# Altium PCB MDQARM.PcbDoc
Units mm, origin at the board's own origin, x right, y up, seen from the top; angles counter-clockwise.
Board outline 100 x 100 mm, 2 copper layers (Top Layer, Bottom Layer), stack 1.536 mm thick; 171 components, 109 nets, 550 pads, 0 vias.
Unrouted connection lines stored in the file: 380.
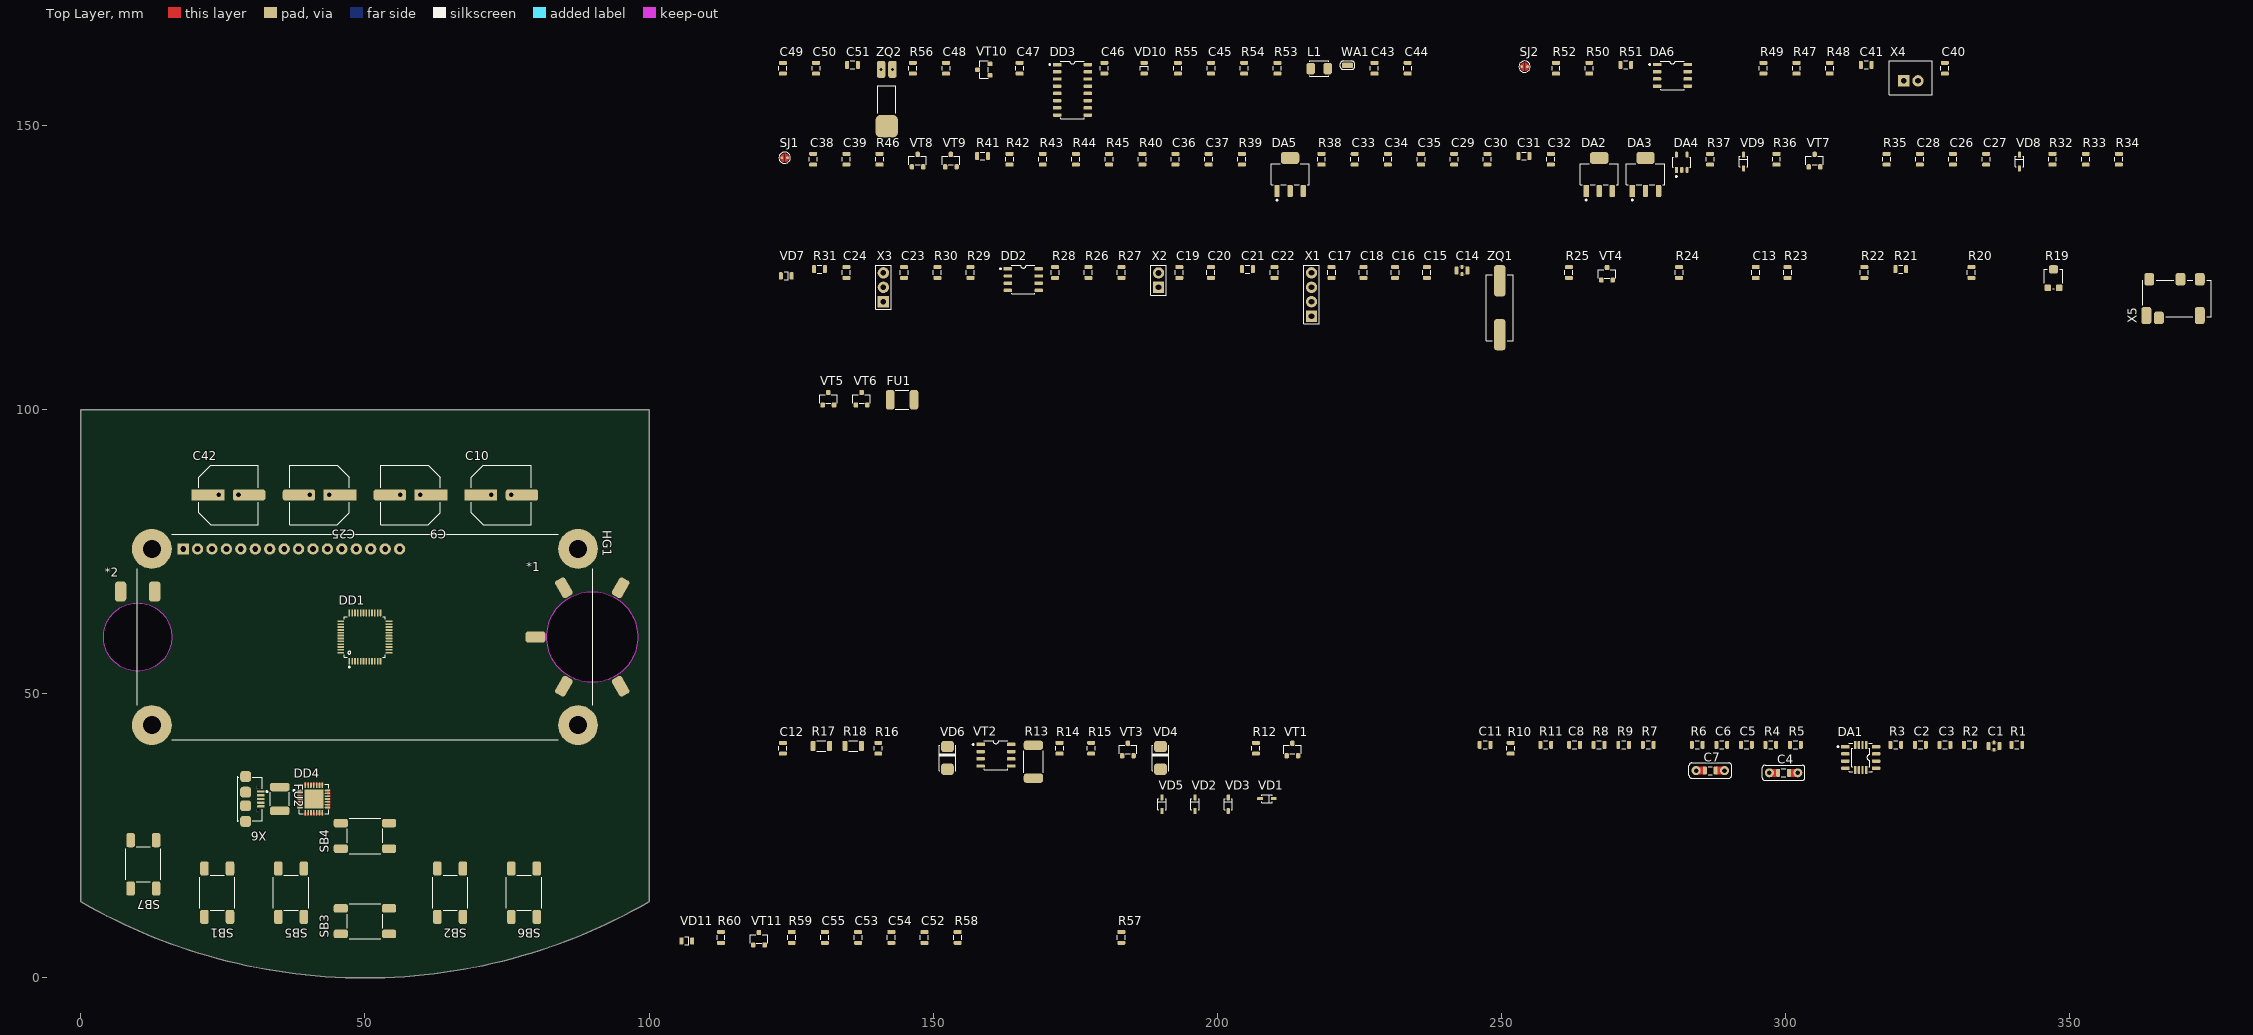
[diagram p0: Top Layer view]
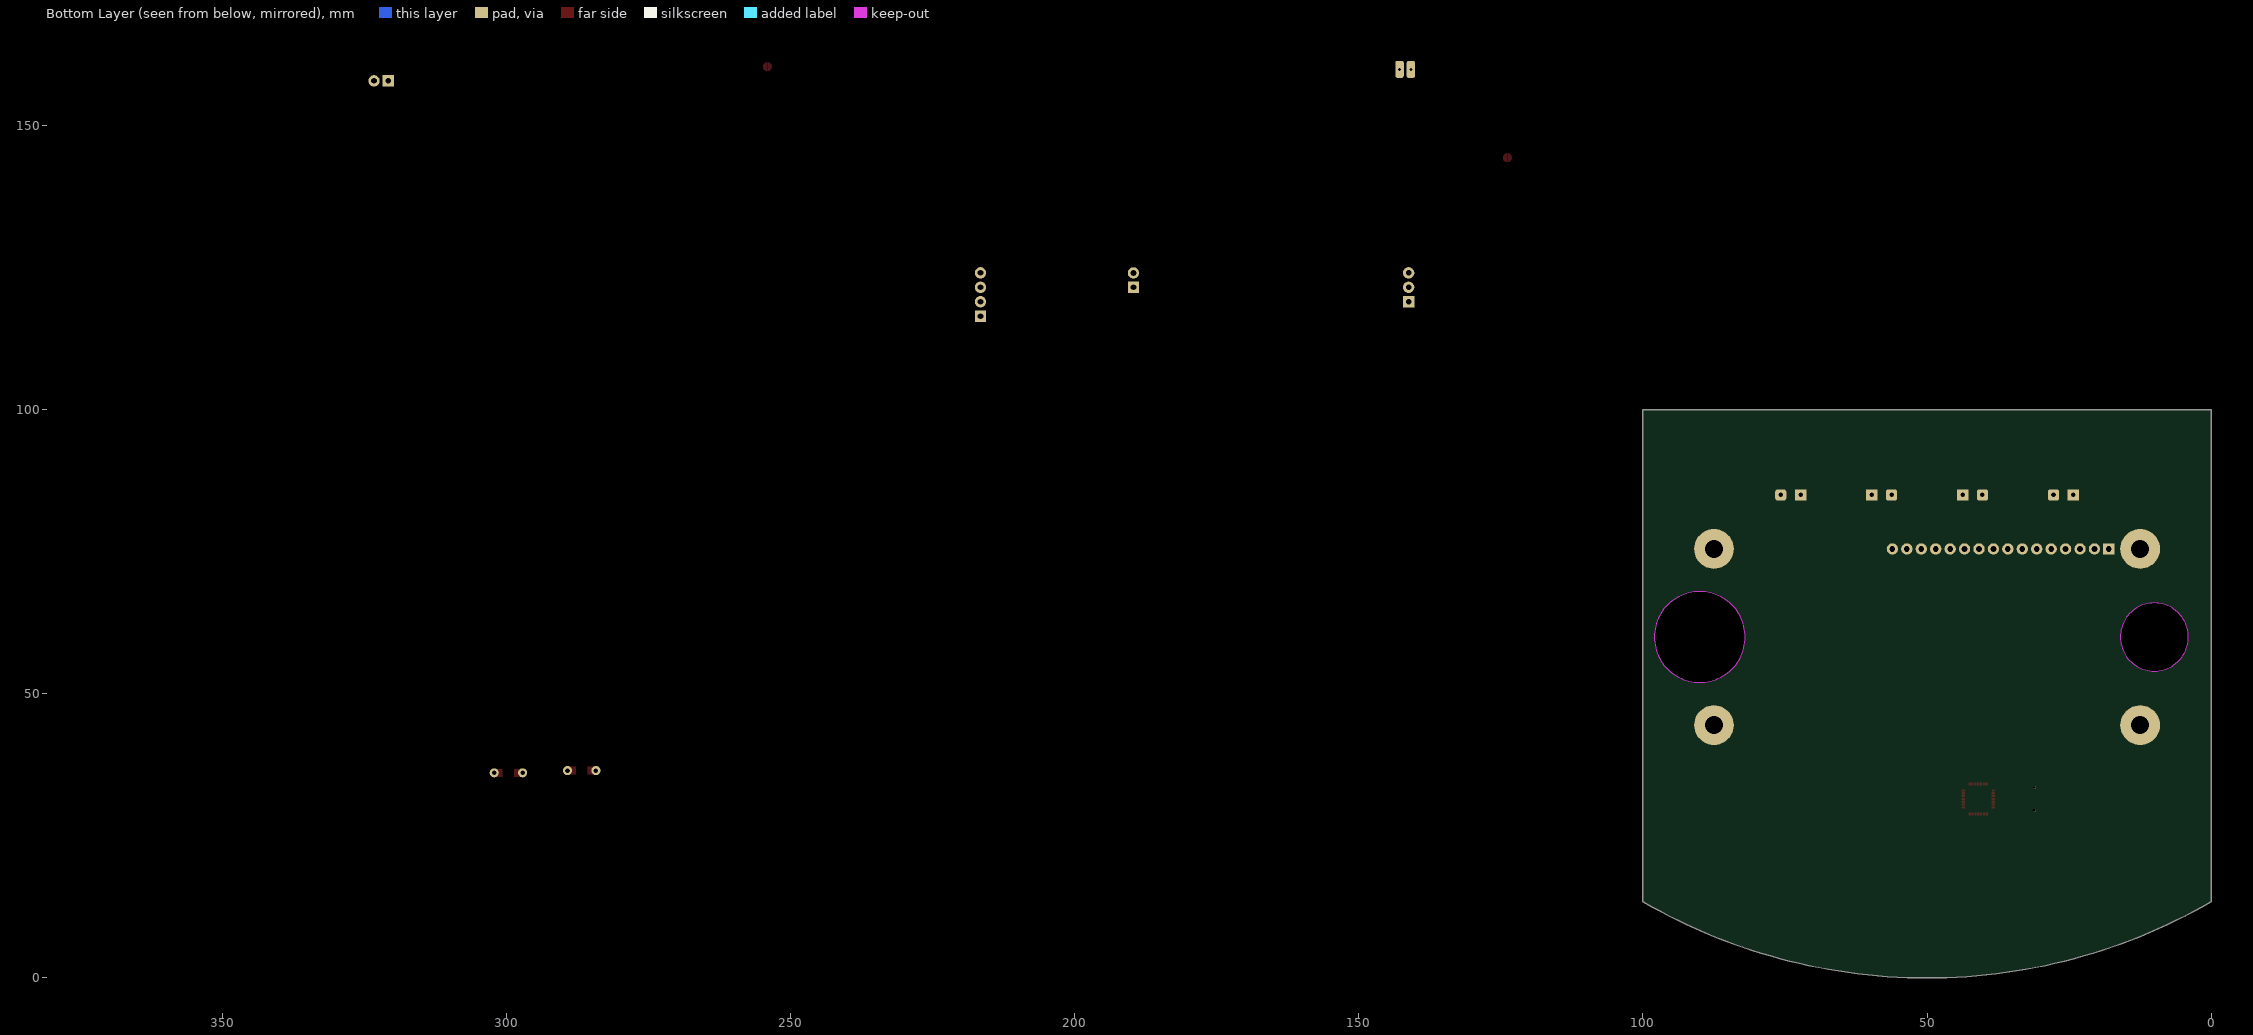
[diagram p1: Bottom Layer view, seen from below]

## Layer stack, top to bottom
Top Solder: solder mask 0.01, Solder Resist, Dk 3.5
Top Layer: signal copper 0.018
Dielectric 1: dielectric 1.5, FR-4, Dk 4.8
Bottom Layer: signal copper 0.018
Bottom Solder: solder mask 0.01, Solder Resist, Dk 3.5

## Board outline
0,13.397 ccw(c50,100) 100,13.397 100,13.398 100,100 0,100

## Design rules (kind name [scope] priority, off if disabled: settings)
Clearance [All] p1: gap=0.2 ignorepadtopadclearanceinfootprint=FALSE
PolygonConnect [All] p1: connectstyle=Relief reliefconductorwidth=0.254 reliefentries=4 polygonreliefangle="90 Angle" airgapwidth=0.254
RoutingVias [All] p1: holewidth=0.711 width=1.27 viastyle="Through Hole" minholewidth=0.711 minwidth=1.27 maxholewidth=0.711 maxwidth=1.27
SolderMaskExpansion [All] p1: expansion=0.102
Width [All] p1: maxlimit=0.254 minlimit=0.254 preferedwidth=0.254
30 further rules are at their usual default settings.

## Classes and differential pairs
component class MDQARM_POWER: *2 C25 C26 C27 C28 C29 C30 C31 C32 C33 C34 C35 C36 C37 C38 C39 DA2 DA3 DA4 DA5 FU1 R32 R33 R34 R35 R36 R37 R38 R39 R40 R41 R42 R43 R44 R45 R46 SB7 SJ1 VD8 VD9 VT5 VT6 VT7 VT8 VT9
component class MDQARM_USB_UART: C52 C53 C54 C55 DD4 FU2 R57 R58 R59 R60 VD11 VT11 X6
component class MDQARM_SOUND: C40 C41 C42 C43 C44 C45 C46 C47 C48 C49 C50 C51 DA6 DD3 L1 R47 R48 R49 R50 R51 R52 R53 R54 R55 R56 SJ2 VD10 VT10 WA1 X4 X5 ZQ2
component class MDQARM_COIL: *1 C1 C2 C3 C4 C5 C6 C7 C8 C9 C10 C11 C12 DA1 R1 R2 R3 R4 R5 R6 R7 R8 R9 R10 R11 R12 R13 R14 R15 R16 R17 R18 VD1 VD2 VD3 VD4 VD5 VD6 VT1 VT2 VT3
component class MDQARM_MCU: C13 C14 C15 C16 C17 C18 C19 C20 C21 C22 C23 C24 C? DD1 DD2 DD? HG1 R19 R20 R21 R22 R23 R24 R25 R26 R27 R28 R29 R30 R31 R? SB1 SB2 SB3 SB4 SB5 SB6 SB? VD7 VT4 X1 X2 X3 X? ZQ1

## Components (designator, comment, footprint, x,y, rotation, side; value= is the part's Value field where it differs from the comment)
*1 "Connector MD_COIL" "Connector MD_COIL" 90,60 r0 top
*2 "Connector MD_POWER" "Connector MD_POWER" 10,60 r0 top
C1 "1,0" "Filter NFM21PC" 336.702,40.801 r0 top
C2 "10,0" "Capacitor SMD0805-T1.35" 323.752,41.026 r0 top
C3 "0,01" "Capacitor SMD0805-T0.75" 328.077,41.026 r0 top
C4 "0,1" "Capacitor SMD0805_5mm" 299.675,36.1 r0 top
C5 "4700" "Capacitor SMD0805-T0.75" 293.125,41.026 r0 top
C6 "22" "Capacitor SMD0805-T0.75" 288.8,41.026 r0 top
C7 "0,033" "Capacitor SMD0805_5mm" 286.775,36.5 r0 top
C8 "4700" "Capacitor SMD0805-T0.75" 262.899,41.026 r0 top
C9 "1000,0" "Capacitor ECAP SMD10x10.5" 58,85 r180 top
C10 "1000,0" "Capacitor ECAP SMD10x10.5" 74,85 r0 top
C11 "0,1" "Capacitor SMD0805-T0.95" 247.148,41.026 r0 top
C12 "2,2" "Capacitor SMD0805-T1.35" 123.567,40.426 r90 top
C13 "0,01" "Capacitor SMD0805-T0.75" 294.775,124.155 r90 top
C14 "1,0" "Filter NFM21PC" 243.073,124.505 r0 top
C15 "0,1" "Capacitor SMD0805-T0.95" 236.898,124.155 r90 top
C16 "0,01" "Capacitor SMD0805-T0.75" 231.297,124.155 r90 top
C17 "30" "Capacitor SMD0805-T0.75" 220.122,124.155 r90 top
C18 "30" "Capacitor SMD0805-T0.75" 225.722,124.155 r90 top
C19 "0,1" "Capacitor SMD0805-T0.95" 193.32,124.155 r90 top
C20 "0,1" "Capacitor SMD0805-T0.95" 198.896,124.155 r90 top
C21 "0,1" "Capacitor SMD0805-T0.95" 205.321,124.755 r0 top
C22 "10,0" "Capacitor SMD0805-T1.35" 210.071,124.155 r90 top
C23 "0,1" "Capacitor SMD0805-T0.95" 144.893,124.155 r90 top
C24 "0,1" "Capacitor SMD0805-T0.95" 134.743,124.155 r90 top
C25 "470,0" "Capacitor ECAP SMD10x10.5" 42,85 r180 top
C26 "0,1" "Capacitor SMD0805-T0.95" 329.477,144.081 r90 top
C27 "4,7" "Capacitor SMD0805-T1.35" 335.327,144.081 r90 top
C28 "1,0" "Capacitor SMD0805-T1.35" 323.652,144.081 r90 top
C29 "0,1" "Capacitor SMD0805-T0.95" 241.698,144.081 r90 top
C30 "10,0" "Capacitor SMD0805-T1.35" 247.548,144.081 r90 top
C31 "10,0" "Capacitor SMD0805-T1.35" 253.973,144.656 r0 top
C32 "10,0" "Capacitor SMD0805-T1.35" 258.724,144.081 r90 top
C33 "10,0" "Capacitor SMD0805-T1.35" 224.197,144.081 r90 top
C34 "0,01" "Capacitor SMD0805-T0.75" 230.022,144.081 r90 top
C35 "10,0" "Capacitor SMD0805-T1.35" 235.872,144.081 r90 top
C36 "0,1" "Capacitor SMD0805-T0.95" 192.645,144.081 r90 top
C37 "0,1" "Capacitor SMD0805-T0.95" 198.496,144.081 r90 top
C38 "0,68" "Capacitor SMD0805-T0.95" 128.892,144.081 r90 top
C39 "0,68" "Capacitor SMD0805-T0.95" 134.743,144.081 r90 top
C40 "4700" "Capacitor SMD0805-T0.75" 328.052,160.106 r90 top
C41 "1,0" "Capacitor SMD0805-T1.35" 314.226,160.681 r0 top
C42 "470,0" "Capacitor ECAP SMD10x10.5" 26,85 r0 top
C43 "0,1" "Capacitor SMD0805-T0.95" 227.672,160.106 r90 top
C44 "1,0" "Capacitor SMD0805-T1.35" 233.522,160.106 r90 top
C45 "1000" "Capacitor SMD0805-T0.75" 198.921,160.106 r90 top
C46 "0,1" "Capacitor SMD0805-T0.95" 180.12,160.106 r90 top
C47 "10" "Capacitor SMD0805-T0.75" 165.219,160.106 r90 top
C48 "0,1" "Capacitor SMD0805-T0.95" 152.268,160.106 r90 top
C49 "0,1" "Capacitor SMD0805-T0.95" 123.567,160.106 r90 top
C50 "15" "Capacitor SMD0805-T0.75" 129.392,160.106 r90 top
C51 "15" "Capacitor SMD0805-T0.75" 135.818,160.681 r0 top
C52 "1,0" "Capacitor SMD0805-T1.35" 148.469,7.132 r90 top
C53 "0,1" "Capacitor SMD0805-T0.95" 136.793,7.132 r90 top
C54 "4,7" "Capacitor SMD0805-T1.35" 142.644,7.132 r90 top
C55 "0,047" "Capacitor SMD0805-T0.75" 130.943,7.132 r90 top
DA1 "AD8606ARZ" "IC AD8606ARZ" 313.251,38.801 r0 top
DA2 "LD1117S33" "IC LD1117S33" 267.224,141.406 r0 top
DA3 "LD1117S50" "IC LD1117S50" 275.374,141.406 r0 top
DA4 "LP2985-33DBVR" "IC LP2985-33DBVR" 281.75,143.556 r0 top
DA5 "LD1117STR" "IC LD1117STR" 212.821,141.406 r0 top
DA6 "MC34119L" "IC MC34119L" 280.1,158.856 r0 top
DD1 "STM32F100C8T6B" "IC STM32F100C8T6B" 50,60 r0 top
DD2 "AT24C08C" "IC AT24C08C" 165.869,122.905 r0 top
DD3 "KT0803L" "IC KT0803L" 174.519,156.306 r0 top
DD4 "CP2102-GMR" "IC CP2102-GMR" 41,31.5 r0 top
FU1 "0,5А" "Fuse MF-NSMF" 144.531,101.756 r0 top
FU2 "0,14А" "Fuse MF-NSMF" 35,31.5 r270 top
HG1 "WH1602" "Indicator WH1602" 50,60 r0 top
L1 "1мкГн" "Inductor SMD1210" 217.947,160.031 r0 top
R1 "10к" "Resistor SMD0805" 340.728,41.026 r0 top
R2 "10к" "Resistor SMD0805" 332.377,41.026 r0 top
R3 "2к" "Resistor SMD0805" 319.427,41.026 r0 top
R4 "100" "Resistor SMD0805" 297.425,41.026 r0 top
R5 "2к" "Resistor SMD0805" 301.751,41.026 r0 top
R6 "100к" "Resistor SMD0805" 284.475,41.026 r0 top
R7 "1,2к" "Resistor SMD0805" 275.849,41.026 r0 top
R8 "100к" "Resistor SMD0805" 267.199,41.026 r0 top
R9 "2к" "Resistor SMD0805" 271.524,41.026 r0 top
R10 "100к" "Resistor SMD0805" 251.648,40.426 r90 top
R11 "10к" "Resistor SMD0805" 257.824,41.026 r0 top
R12 "1к" "Resistor SMD0805" 206.796,40.426 r90 top
R13 "7,5" "Resistor SMD2512" 167.644,38.051 r90 top
R14 "1к" "Resistor SMD0805" 172.244,40.426 r90 top
R15 "1к" "Resistor SMD0805" 177.82,40.426 r90 top
R16 "10к" "Resistor SMD0805" 140.343,40.426 r90 top
R17 "1" "Resistor SMD1206" 130.317,40.826 r0 top
R18 "1" "Resistor SMD1206" 135.918,40.826 r0 top
R19 "10к" "Resistor 3303X-3" 347.178,123.055 r0 top
R20 "10к" "Resistor SMD0805" 332.727,124.155 r90 top
R21 "1к" "Resistor SMD0805" 320.302,124.755 r0 top
R22 "100" "Resistor SMD0805" 313.876,124.155 r90 top
R23 "100" "Resistor SMD0805" 300.376,124.155 r90 top
R24 "100" "Resistor SMD0805" 281.275,124.155 r90 top
R25 "1к" "Resistor SMD0805" 261.899,124.155 r90 top
R26 "4,7к" "Resistor SMD0805" 177.32,124.155 r90 top
R27 "4,7к" "Resistor SMD0805" 183.145,124.155 r90 top
R28 "1к" "Resistor SMD0805" 171.469,124.155 r90 top
R29 "10к" "Resistor SMD0805" 156.569,124.155 r90 top
R30 "10к" "Resistor SMD0805" 150.743,124.155 r90 top
R31 "1к" "Resistor SMD0805" 129.992,124.755 r0 top
R32 "10к" "Resistor SMD0805" 347.003,144.081 r90 top
R33 "100к" "Resistor SMD0805" 352.853,144.081 r90 top
R34 "100к" "Resistor SMD0805" 358.678,144.081 r90 top
R35 "330k" "Resistor SMD0805" 317.801,144.081 r90 top value=330к
R36 "10к" "Resistor SMD0805" 298.426,144.081 r90 top
R37 "220к" "Resistor SMD0805" 286.75,144.081 r90 top
R38 "18к" "Resistor SMD0805" 218.347,144.081 r90 top
R39 "3,3к" "Resistor SMD0805" 204.346,144.081 r90 top
R40 "150" "Resistor SMD0805" 186.82,144.081 r90 top
R41 "1к" "Resistor SMD0805" 158.694,144.656 r0 top
R42 "10к" "Resistor SMD0805" 163.444,144.081 r90 top
R43 "10к" "Resistor SMD0805" 169.294,144.081 r90 top
R44 "220к" "Resistor SMD0805" 175.12,144.081 r90 top
R45 "470k" "Resistor SMD0805" 180.97,144.081 r90 top value=470к
R46 "1к" "Resistor SMD0805" 140.568,144.081 r90 top
R47 "10к" "Resistor SMD0805" 301.951,160.106 r90 top
R48 "33к" "Resistor SMD0805" 307.801,160.106 r90 top
R49 "270" "Resistor SMD0805" 296.125,160.106 r90 top
R50 "1к" "Resistor SMD0805" 265.474,160.106 r90 top
R51 "2" "Resistor SMD0805" 271.899,160.681 r0 top
R52 "2" "Resistor SMD0805" 259.624,160.106 r90 top
R53 "4,7к" "Resistor SMD0805" 210.596,160.106 r90 top
R54 "10к" "Resistor SMD0805" 204.746,160.106 r90 top
R55 "47к" "Resistor SMD0805" 193.07,160.106 r90 top
R56 "1к" "Resistor SMD0805" 146.418,160.106 r90 top
R57 "1к" "Resistor SMD0805" 183.121,7.132 r90 top
R58 "1к" "Resistor SMD0805" 154.319,7.132 r90 top
R59 "1к" "Resistor SMD0805" 125.118,7.132 r90 top
R60 "100к" "Resistor SMD0805" 112.667,7.132 r90 top
SB1 "KLS7-TS6604-4.3-180" "Button KLS7-TS6604-4.3-180" 24,15 r270 top
SB2 "KLS7-TS6604-4.3-180" "Button KLS7-TS6604-4.3-180" 65,15 r270 top
SB3 "KLS7-TS6604-4.3-180" "Button KLS7-TS6604-4.3-180" 50,10 r180 top
SB4 "KLS7-TS6604-4.3-180" "Button KLS7-TS6604-4.3-180" 50,25 r180 top
SB5 "KLS7-TS6604-4.3-180" "Button KLS7-TS6604-4.3-180" 37,15 r270 top
SB6 "KLS7-TS6604-4.3-180" "Button KLS7-TS6604-4.3-180" 78,15 r270 top
SB7 "KLS7-TS6604-4.3-180" "Button KLS7-TS6604-4.3-180" 11,20 r270 top
SJ1 "SolderJump 1" "SolderJump 1" 123.867,144.356 r0 top
SJ2 "SolderJump 1" "SolderJump 1" 254.098,160.381 r0 top
VD1 "1N4148WS" "Diode SOD-323" 208.743,31.55 r0 top
VD2 "1N4148WS" "Diode SOD-323" 196.092,30.575 r90 top
VD3 "1N4148WS" "Diode SOD-323" 201.943,30.575 r90 top
VD4 "ES1J" "Diode SMA" 190.02,38.726 r90 top
VD5 "1N4148WS" "Diode SOD-323" 190.267,30.575 r90 top
VD6 "ES1J" "Diode SMA" 152.518,38.726 r90 top
VD7 "RED" "Diode SMD0805" 124.142,123.555 r0 top
VD8 "1N4148WS" "Diode SOD-323" 341.178,143.681 r90 top
VD9 "BAT54WS" "Diode SOD-323" 292.625,143.681 r90 top
VD10 "RED" "Diode SMD0805" 187.145,160.106 r90 top
VD11 "GREEN" "Diode SMD0805" 106.642,6.507 r0 top
VT1 "BC847B" "Transistor SOT23" 213.221,40.201 r0 top
VT2 "IRF7105PBF" "Transisror IRF7105" 161.044,39.201 r0 top value=IRF7105BPF
VT3 "BC847B" "Transistor SOT23" 184.27,40.201 r0 top
VT4 "BC847B" "Transistor SOT23" 268.599,123.93 r0 top
VT5 "IRLML6402TRPBF" "Transistor SOT23" 131.555,101.931 r0 top
VT6 "IRLML6402TRPBF" "Transistor SOT23" 137.405,101.931 r0 top
VT7 "IRLML2502TRPBF" "Transistor SOT23" 305.126,143.856 r0 top
VT8 "BC847B" "Transistor SOT23" 147.268,143.856 r0 top
VT9 "2N7002" "Transistor SOT23" 153.118,143.856 r0 top
VT10 "2SC3356" "Transistor SOT23" 158.919,159.856 r90 top
VT11 "IRLML2502TRPBF" "Transistor SOT23" 119.343,6.882 r0 top
WA1 "Antenna 1" "Antenna 1" 222.922,160.631 r0 top
X1 "PLS-4" "Connector PLS-4" 216.597,120.28 r90 top
X2 "PLS-2" "Connector PLS-2" 189.67,122.805 r90 top
X3 "PLS-3" "Connector PLS-3" 141.243,121.555 r90 top
X4 "B2B-XH-A" "Connector B2B-XH-A" 322.077,157.881 r0 top
X5 "PJ-311D" "Connector PJ-311D" 372.525,119.575 r180 top
X6 "KLS1-233-0-0-1-T" "Connector KLS1-233-0-0-1-T" 29,31.5 r270 top
ZQ1 "8 МГц" "Quartz HC-49SM" 249.723,117.954 r90 top value=HC-49SM-8MHz
ZQ2 "32768 Гц" "Quartz DT-38T-32768Hz" 141.843,152.906 r90 top value=DT-38T-32768Hz

## Footprints (in the part's own frame and the unit in brackets; to place one, negate y for a bottom-side part, rotate by r counter-clockwise, add the part's x,y. Pads: shape width x height; smd on the part's side, far side on the other; paste and mask are expansions set on the pad)
"Antenna 1" [mm]
  rrect50% 2x1 smd mask+0.075: 1(0,0)
  silkscreen extent -1.25,-0.75 1.25,0.75
"Button KLS7-TS6604-4.3-180" [mm]
  rrect50% 2.5x1.5 smd mask+0.075: 1(-4.25,-2.25) 2(4.25,-2.25) 3(4.25,2.25) 4(-4.25,2.25)
  silkscreen extent -3.1,-3.1 3.1,3.1, body extent -4.5,-3 4.5,3, height 4.3
"Capacitor ECAP SMD10x10.5" [mm]
  rect 5x2 smd mask+0.075: 1(-4,0)
  rect 2x2 hole 0.8 mask+0.075: 1(-1.75,0)
  rrect50% 2x2 hole 0.8 mask+0.075: 2(1.75,0)
  rrect50% 5x2 smd mask+0.075: 2(4,0)
  silkscreen extent -5.25,-5.25 5.25,5.25, body extent -6,-5.25 6,5.25, height 10.5
"Capacitor SMD0805-T0.75" [mm]
  rrect50% 0.7x1.4 smd mask+0.075: 1(-0.95,0) 2(0.95,0)
  silkscreen extent -0.38,-0.7 0.38,0.7, body extent -1.05,-0.67 1.05,0.68, height 0.75
"Capacitor SMD0805-T0.95" [mm]
  rrect50% 0.7x1.4 smd mask+0.075: 1(-0.95,0) 2(0.95,0)
  silkscreen extent -0.38,-0.7 0.38,0.7, body extent -1.05,-0.67 1.05,0.68, height 0.95
"Capacitor SMD0805-T1.35" [mm]
  rrect50% 0.7x1.4 smd mask+0.075: 1(-0.95,0) 2(0.95,0)
  silkscreen extent -0.38,-0.7 0.38,0.7, body extent -1.05,-0.67 1.05,0.68, height 1.35
"Capacitor SMD0805_5mm" [mm]
  round 1.6 hole 0.8 mask+0.075: 1(-2.5,0) 2(2.5,0)
  rrect50% 0.7x1.4 smd mask+0.075: 1(-0.95,0) 2(0.95,0)
  Top Layer region: 2.5,0.7 1,0.7 1,-0.7 2.5,-0.7
  Top Layer region: -2.5,-0.7 -1,-0.7 -1,0.7 -2.5,0.7
  silkscreen extent -3.75,-1.35 3.75,1.35, body extent -3.6,-1.25 3.6,1.25, height 6.5
"Connector B2B-XH-A" [mm]
  rect 2x2 hole 1 mask+0.075: 1(-1.25,0)
  round 2 hole 1 mask+0.075: 2(1.25,0)
  silkscreen extent -3.8,-2.45 3.8,3.5, body extent -3.59,-2.49 3.59,3.35, height 7.21
"Connector KLS1-233-0-0-1-T" [mm]
  rect 0.4x1.35 smd mask+0.075: 1(-1.3,2.675)
  rrect50% 0.4x1.35 smd mask+0.075: 2(-0.65,2.675) 3(0,2.675) 4(0.65,2.675) 5(1.3,2.675)
  rrect50% 1.9x1.9 smd mask+0.075: EP(-3.95,0) EP(-1.2,0) EP(1.2,0) EP(3.95,0)
  round 0.5 hole 0.5 unplated mask+0.075: MH(-2,2.15) MH(2,2.15)
  silkscreen extent -4,-1.35 4,3.88, body extent -3.99,-2.58 3.99,2.85, height 2.73
"Connector MD_COIL" [mm]
  rrect50% 3.5x2 smd rot 120 mask+0.075: 1(5,-8.66) 4(-5,8.66)
  rrect50% 3.5x2 smd rot 60 mask+0.075: 2(-5,-8.66) 5(5,8.66)
  rrect50% 3.5x2 smd mask+0.075: 3(-10,0)
  Keep-Out Layer board cut-out: 0,8 3.061,7.391 5.657,5.657 7.391,3.061 8,0 8,0 7.391,-3.061 5.657,-5.657 3.061,-7.391 0,-8 0,-8 -3.061,-7.391 -5.657,-5.657 -7.391,-3.061 -8,0 -8,0 -7.391,3.061 -5.657,5.657 -3.061,7.391 0,8
"Connector MD_POWER" [mm]
  rrect50% 2x3.5 smd mask+0.075: 1(-3,8) 2(3,8)
  Keep-Out Layer board cut-out: 0,6 2.296,5.543 4.243,4.243 5.543,2.296 6,0 6,0 5.543,-2.296 4.243,-4.243 2.296,-5.543 0,-6 0,-6 -2.296,-5.543 -4.243,-4.243 -5.543,-2.296 -6,0 -6,0 -5.543,2.296 -4.243,4.243 -2.296,5.543 0,6
"Connector PJ-311D" [mm]
  rrect50% 1.75x2.2 smd mask+0.075: 1(-0.4,-3.4) 3(3,-3.4) 4(6.8,3.4) 6(8.5,-3.4)
  rrect50% 1.75x3 smd mask+0.075: 2(-0.4,3) 5(9,3)
  rrect50% 0.5x0.5 hole 1.5 unplated mask+0.075: MH(0,0) MH(7,0)
  silkscreen extent -2.4,-3.25 9.6,3.25, body extent -4.5,-4.15 9.5,4.15, height 4.92
"Connector PLS-2" [mm]
  rect 2x2 hole 1 mask+0.075: 1(-1.27,0)
  round 2 hole 1 mask+0.075: 2(1.27,0)
  silkscreen extent -2.64,-1.37 2.64,1.37, body extent -2.54,-1.27 2.54,1.27, height 8.6
"Connector PLS-3" [mm]
  rect 2x2 hole 1 mask+0.075: 1(-2.54,0)
  round 2 hole 1 mask+0.075: 2(0,0) 3(2.54,0)
  silkscreen extent -3.91,-1.37 3.91,1.37, body extent -3.81,-1.27 3.81,1.27, height 8.6
"Connector PLS-4" [mm]
  rect 2x2 hole 1 mask+0.075: 1(-3.81,0)
  round 2 hole 1 mask+0.075: 2(-1.27,0) 3(1.27,0) 4(3.81,0)
  silkscreen extent -5.18,-1.37 5.18,1.37, body extent -5.08,-1.27 5.08,1.27, height 8.6
"Diode SMA" [mm]
  rrect50% 2x2.25 smd mask+0.075: 1(-2,0) 2(2,0)
  silkscreen extent -2.25,-1.45 2.25,1.45, body extent -2.8,-1.48 2.8,1.47, height 2.9
"Diode SMD0805" [mm]
  rrect50% 0.7x1.3 smd mask+0.075: 1(-0.95,0) 2(0.95,0)
  silkscreen extent -0.38,-0.7 0.38,0.7, body extent -1.05,-0.67 1.05,2, height 1.1
"Diode SOD-323" [mm]
  rrect50% 1.05x0.55 smd mask+0.075: 1(-1.2,0) 2(1.2,0)
  silkscreen extent -0.95,-0.72 0.95,0.72, body extent -1.35,-0.72 1.35,0.73, height 1.1
"Filter NFM21PC" [mm]
  rrect50% 0.7x1.4 smd mask+0.075: 1(-0.95,0) 3(0.95,0)
  rrect50% 0.6x0.65 smd mask+0.075: 2(0,-0.625) 2(0,0.625)
  silkscreen extent -0.51,-0.7 0.51,0.7, body extent -1.01,-0.64 1.01,0.64, height 0.87
"Fuse MF-NSMF" [mm]
  rrect50% 1.5x3.4 smd mask+0.075: 1(-2.1,0) 2(2.1,0)
  silkscreen extent -1.2,-1.7 1.2,1.7, body extent -2.36,-1.7 2.37,1.71, height 0.85
"IC AD8606ARZ" [mm]
  rect 1.5x0.6 smd mask+0.075: 1(-2.7,1.905)
  rect 0.4x1.45 smd mask+0.075: 1(0.975,2.2)
  rrect50% 1.5x0.6 smd mask+0.075: 2(-2.7,0.635) 3(-2.7,-0.635) 4(-2.7,-1.905) 5(2.7,-1.905) 6(2.7,-0.635) 7(2.7,0.635) 8(2.7,1.905)
  rrect50% 0.4x1.45 smd mask+0.075: 2(0.325,2.2) 3(-0.325,2.2) 4(-0.975,2.2) 5(-0.975,-2.2) 6(-0.325,-2.2) 7(0.325,-2.2) 8(0.975,-2.2)
  silkscreen extent -4.12,-2.52 2.05,2.52, body extent -3.1,-2.5 3.1,2.5, height 1.75
"IC AT24C08C" [mm]
  rect 1.5x0.6 smd mask+0.075: 1(-2.7,1.905)
  rrect50% 1.5x0.6 smd mask+0.075: 2(-2.7,0.635) 3(-2.7,-0.635) 4(-2.7,-1.905) 5(2.7,-1.905) 6(2.7,-0.635) 7(2.7,0.635) 8(2.7,1.905)
  silkscreen extent -4.12,-2.52 2.05,2.52, body extent -3.1,-2.5 3.1,2.5, height 1.75
"IC CP2102-GMR" [mm]
  oval 0.97x0.3 smd mask+0.075: 1(-2.4,1.5) 2(-2.4,1) 3(-2.4,0.5) 4(-2.4,0) 5(-2.4,-0.5) 6(-2.4,-1) 7(-2.4,-1.5) 15(2.4,-1.5) 16(2.4,-1) 17(2.4,-0.5) 18(2.4,0) 19(2.4,0.5) 20(2.4,1) 21(2.4,1.5)
  oval 0.3x0.97 smd mask+0.075: 8(-1.5,-2.4) 9(-1,-2.4) 10(-0.5,-2.4) 11(0,-2.4) 12(0.5,-2.4) 13(1,-2.4) 14(1.5,-2.4) 22(1.5,2.4) 23(1,2.4) 24(0.5,2.4) 25(0,2.4) 26(-0.5,2.4) 27(-1,2.4) 28(-1.5,2.4)
  rect 3.35x3.35 smd mask+0.075: EP(0,0)
  Top Layer region: -2.885,1.35 -2.4,1.35 -2.4,1.65 -2.885,1.65
  Top Layer region: -2.4,1.15 -2.81,1.15 -2.839,1.144 -2.863,1.128 -2.879,1.104 -2.885,1.075 -2.885,1.075 -2.885,0.925 -2.879,0.896 -2.863,0.872 -2.839,0.856 -2.81,0.85 -2.81,0.85 -2.4,0.85
  Top Layer region: -2.4,0.65 -2.81,0.65 -2.839,0.644 -2.863,0.628 -2.879,0.604 -2.885,0.575 -2.885,0.575 -2.885,0.425 -2.879,0.396 -2.863,0.372 -2.839,0.356 -2.81,0.35 -2.81,0.35 -2.4,0.35
  Top Layer region: -2.4,0.15 -2.81,0.15 -2.839,0.144 -2.863,0.128 -2.879,0.104 -2.885,0.075 -2.885,0.075 -2.885,-0.075 -2.879,-0.104 -2.863,-0.128 -2.839,-0.144 -2.81,-0.15 -2.81,-0.15 -2.4,-0.15
  Top Layer region: -2.4,-0.35 -2.81,-0.35 -2.839,-0.356 -2.863,-0.372 -2.879,-0.396 -2.885,-0.425 -2.885,-0.425 -2.885,-0.575 -2.879,-0.604 -2.863,-0.628 -2.839,-0.644 -2.81,-0.65 -2.81,-0.65 -2.4,-0.65
  Top Layer region: -2.4,-0.85 -2.81,-0.85 -2.839,-0.856 -2.863,-0.872 -2.879,-0.896 -2.885,-0.925 -2.885,-0.925 -2.885,-1.075 -2.879,-1.104 -2.863,-1.128 -2.839,-1.144 -2.81,-1.15 -2.81,-1.15 -2.4,-1.15
  Top Layer region: -2.4,-1.35 -2.81,-1.35 -2.839,-1.356 -2.863,-1.372 -2.879,-1.396 -2.885,-1.425 -2.885,-1.425 -2.885,-1.575 -2.879,-1.604 -2.863,-1.628 -2.839,-1.644 -2.81,-1.65 -2.81,-1.65 -2.4,-1.65
  Top Layer region: -1.65,-2.4 -1.65,-2.81 -1.644,-2.839 -1.628,-2.863 -1.604,-2.879 -1.575,-2.885 -1.575,-2.885 -1.425,-2.885 -1.396,-2.879 -1.372,-2.863 -1.356,-2.839 -1.35,-2.81 -1.35,-2.81 -1.35,-2.4
  Top Layer region: -1.15,-2.4 -1.15,-2.81 -1.144,-2.839 -1.128,-2.863 -1.104,-2.879 -1.075,-2.885 -1.075,-2.885 -0.925,-2.885 -0.896,-2.879 -0.872,-2.863 -0.856,-2.839 -0.85,-2.81 -0.85,-2.81 -0.85,-2.4
  Top Layer region: -0.65,-2.4 -0.65,-2.81 -0.644,-2.839 -0.628,-2.863 -0.604,-2.879 -0.575,-2.885 -0.575,-2.885 -0.425,-2.885 -0.396,-2.879 -0.372,-2.863 -0.356,-2.839 -0.35,-2.81 -0.35,-2.81 -0.35,-2.4
  Top Layer region: -0.15,-2.4 -0.15,-2.81 -0.144,-2.839 -0.128,-2.863 -0.104,-2.879 -0.075,-2.885 -0.075,-2.885 0.075,-2.885 0.104,-2.879 0.128,-2.863 0.144,-2.839 0.15,-2.81 0.15,-2.81 0.15,-2.4
  Top Layer region: 0.35,-2.4 0.35,-2.81 0.356,-2.839 0.372,-2.863 0.396,-2.879 0.425,-2.885 0.425,-2.885 0.575,-2.885 0.604,-2.879 0.628,-2.863 0.644,-2.839 0.65,-2.81 0.65,-2.81 0.65,-2.4
  Top Layer region: 0.85,-2.4 0.85,-2.81 0.856,-2.839 0.872,-2.863 0.896,-2.879 0.925,-2.885 0.925,-2.885 1.075,-2.885 1.104,-2.879 1.128,-2.863 1.144,-2.839 1.15,-2.81 1.15,-2.81 1.15,-2.4
  Top Layer region: 1.35,-2.4 1.35,-2.81 1.356,-2.839 1.372,-2.863 1.396,-2.879 1.425,-2.885 1.425,-2.885 1.575,-2.885 1.604,-2.879 1.628,-2.863 1.644,-2.839 1.65,-2.81 1.65,-2.81 1.65,-2.4
  Top Layer region: 2.4,-1.65 2.81,-1.65 2.839,-1.644 2.863,-1.628 2.879,-1.604 2.885,-1.575 2.885,-1.575 2.885,-1.425 2.879,-1.396 2.863,-1.372 2.839,-1.356 2.81,-1.35 2.81,-1.35 2.4,-1.35
  Top Layer region: 2.4,-1.15 2.81,-1.15 2.839,-1.144 2.863,-1.128 2.879,-1.104 2.885,-1.075 2.885,-1.075 2.885,-0.925 2.879,-0.896 2.863,-0.872 2.839,-0.856 2.81,-0.85 2.81,-0.85 2.4,-0.85
  Top Layer region: 2.4,-0.65 2.81,-0.65 2.839,-0.644 2.863,-0.628 2.879,-0.604 2.885,-0.575 2.885,-0.575 2.885,-0.425 2.879,-0.396 2.863,-0.372 2.839,-0.356 2.81,-0.35 2.81,-0.35 2.4,-0.35
  Top Layer region: 2.4,-0.15 2.81,-0.15 2.839,-0.144 2.863,-0.128 2.879,-0.104 2.885,-0.075 2.885,-0.075 2.885,0.075 2.879,0.104 2.863,0.128 2.839,0.144 2.81,0.15 2.81,0.15 2.4,0.15
  Top Layer region: 2.4,0.35 2.81,0.35 2.839,0.356 2.863,0.372 2.879,0.396 2.885,0.425 2.885,0.425 2.885,0.575 2.879,0.604 2.863,0.628 2.839,0.644 2.81,0.65 2.81,0.65 2.4,0.65
  Top Layer region: 2.4,0.85 2.81,0.85 2.839,0.856 2.863,0.872 2.879,0.896 2.885,0.925 2.885,0.925 2.885,1.075 2.879,1.104 2.863,1.128 2.839,1.144 2.81,1.15 2.81,1.15 2.4,1.15
  Top Layer region: 2.4,1.35 2.81,1.35 2.839,1.356 2.863,1.372 2.879,1.396 2.885,1.425 2.885,1.425 2.885,1.575 2.879,1.604 2.863,1.628 2.839,1.644 2.81,1.65 2.81,1.65 2.4,1.65
  Top Layer region: 1.65,2.4 1.65,2.81 1.644,2.839 1.628,2.863 1.604,2.879 1.575,2.885 1.575,2.885 1.425,2.885 1.396,2.879 1.372,2.863 1.356,2.839 1.35,2.81 1.35,2.81 1.35,2.4
  Top Layer region: 1.15,2.4 1.15,2.81 1.144,2.839 1.128,2.863 1.104,2.879 1.075,2.885 1.075,2.885 0.925,2.885 0.896,2.879 0.872,2.863 0.856,2.839 0.85,2.81 0.85,2.81 0.85,2.4
  Top Layer region: 0.65,2.4 0.65,2.81 0.644,2.839 0.628,2.863 0.604,2.879 0.575,2.885 0.575,2.885 0.425,2.885 0.396,2.879 0.372,2.863 0.356,2.839 0.35,2.81 0.35,2.81 0.35,2.4
  Top Layer region: 0.15,2.4 0.15,2.81 0.144,2.839 0.128,2.863 0.104,2.879 0.075,2.885 0.075,2.885 -0.075,2.885 -0.104,2.879 -0.128,2.863 -0.144,2.839 -0.15,2.81 -0.15,2.81 -0.15,2.4
  Top Layer region: -0.35,2.4 -0.35,2.81 -0.356,2.839 -0.372,2.863 -0.396,2.879 -0.425,2.885 -0.425,2.885 -0.575,2.885 -0.604,2.879 -0.628,2.863 -0.644,2.839 -0.65,2.81 -0.65,2.81 -0.65,2.4
  Top Layer region: -0.85,2.4 -0.85,2.81 -0.856,2.839 -0.872,2.863 -0.896,2.879 -0.925,2.885 -0.925,2.885 -1.075,2.885 -1.104,2.879 -1.128,2.863 -1.144,2.839 -1.15,2.81 -1.15,2.81 -1.15,2.4
  Top Layer region: -1.35,2.4 -1.35,2.81 -1.356,2.839 -1.372,2.863 -1.396,2.879 -1.425,2.885 -1.425,2.885 -1.575,2.885 -1.604,2.879 -1.628,2.863 -1.644,2.839 -1.65,2.81 -1.65,2.81 -1.65,2.4
  silkscreen extent -3.62,-2.6 2.6,2.6, body extent -2.6,-2.6 2.6,2.6, height 0.95
"IC KT0803L" [mm]
  rect 1.5x0.6 smd mask+0.075: 1(-2.7,4.445)
  rrect50% 1.5x0.6 smd mask+0.075: 2(-2.7,3.175) 3(-2.7,1.905) 4(-2.7,0.635) 5(-2.7,-0.635) 6(-2.7,-1.905) 7(-2.7,-3.175) 8(-2.7,-4.445) 9(2.7,-4.445) 10(2.7,-3.175) 11(2.7,-1.905) 12(2.7,-0.635) 13(2.7,0.635) 14(2.7,1.905) 15(2.7,3.175) 16(2.7,4.445)
  silkscreen extent -4.12,-5.06 2.05,5.06, body extent -3.1,-5 3.1,5, height 1.75
"IC LD1117S33" [mm]
  rect 0.95x2.15 smd mask+0.075: 1(-2.3,-2.9)
  rrect50% 0.95x2.15 smd mask+0.075: 2(0,-2.9) 3(2.3,-2.9)
  rrect50% 3.25x2.15 smd mask+0.075: 4(0,2.9)
  silkscreen extent -3.35,-4.62 3.35,1.85, body extent -3.35,-3.65 3.35,3.65, height 1.8
"IC LD1117S50" [mm]
  rect 0.95x2.15 smd mask+0.075: 1(-2.3,-2.9)
  rrect50% 0.95x2.15 smd mask+0.075: 2(0,-2.9) 3(2.3,-2.9)
  rrect50% 3.25x2.15 smd mask+0.075: 4(0,2.9)
  silkscreen extent -3.35,-4.62 3.35,1.85, body extent -3.35,-3.65 3.35,3.65, height 1.8
"IC LD1117STR" [mm]
  rect 0.95x2.15 smd mask+0.075: 1(-2.3,-2.9)
  rrect50% 0.95x2.15 smd mask+0.075: 2(0,-2.9) 3(2.3,-2.9)
  rrect50% 3.25x2.15 smd mask+0.075: 4(0,2.9)
  silkscreen extent -3.35,-4.62 3.35,1.85, body extent -3.35,-3.65 3.35,3.65, height 1.8
"IC LP2985-33DBVR" [mm]
  rect 0.55x1 smd mask+0.075: 1(-0.95,-1.35)
  rrect50% 0.55x1 smd mask+0.075: 2(0,-1.35) 3(0.95,-1.35) 4(0.95,1.35) 5(-0.95,1.35)
  silkscreen extent -1.55,-2.62 1.55,0.9, body extent -1.55,-1.6 1.55,1.6, height 1.45
"IC MC34119L" [mm]
  rect 1.5x0.6 smd mask+0.075: 1(-2.7,1.905)
  rrect50% 1.5x0.6 smd mask+0.075: 2(-2.7,0.635) 3(-2.7,-0.635) 4(-2.7,-1.905) 5(2.7,-1.905) 6(2.7,-0.635) 7(2.7,0.635) 8(2.7,1.905)
  silkscreen extent -4.12,-2.52 2.05,2.52, body extent -3.1,-2.5 3.1,2.5, height 1.75
"IC STM32F100C8T6B" [mm]
  rect 0.3x1.2 smd mask+0.05: 1(-2.75,-4.25)
  rrect50% 0.3x1.2 smd mask+0.05: 2(-2.25,-4.25) 3(-1.75,-4.25) 4(-1.25,-4.25) 5(-0.75,-4.25) 6(-0.25,-4.25) 7(0.25,-4.25) 8(0.75,-4.25) 9(1.25,-4.25) 10(1.75,-4.25) 11(2.25,-4.25) 12(2.75,-4.25) 25(2.75,4.25) 26(2.25,4.25) 27(1.75,4.25) 28(1.25,4.25) 29(0.75,4.25) 30(0.25,4.25) 31(-0.25,4.25) 32(-0.75,4.25) 33(-1.25,4.25) 34(-1.75,4.25) 35(-2.25,4.25) 36(-2.75,4.25)
  rrect50% 1.2x0.3 smd mask+0.05: 13(4.25,-2.75) 14(4.25,-2.25) 15(4.25,-1.75) 16(4.25,-1.25) 17(4.25,-0.75) 18(4.25,-0.25) 19(4.25,0.25) 20(4.25,0.75) 21(4.25,1.25) 22(4.25,1.75) 23(4.25,2.25) 24(4.25,2.75) 37(-4.25,2.75) 38(-4.25,2.25) 39(-4.25,1.75) 40(-4.25,1.25) 41(-4.25,0.75) 42(-4.25,0.25) 43(-4.25,-0.25) 44(-4.25,-0.75) 45(-4.25,-1.25) 46(-4.25,-1.75) 47(-4.25,-2.25) 48(-4.25,-2.75)
  silkscreen extent -3.6,-5.37 3.6,3.6, body extent -4.6,-4.6 4.6,4.6, height 1.6
"Indicator WH1602" [mm]
  rect 2x2 hole 1 mask+0.075: 1(-32,15.5)
  round 2 hole 1 mask+0.075: 2(-29.46,15.5) 3(-26.92,15.5) 4(-24.38,15.5) 5(-21.84,15.5) 6(-19.3,15.5) 7(-16.76,15.5) 8(-14.22,15.5) 9(-11.68,15.5) 10(-9.14,15.5) 11(-6.6,15.5) 12(-4.06,15.5) 13(-1.52,15.5) 14(1.02,15.5) 15(3.56,15.5) 16(6.1,15.5)
  round 7 hole 3.2 mask+0.075: MH(-37.5,-15.5) MH(-37.5,15.5) MH(37.5,-15.5) MH(37.5,15.5)
  silkscreen extent -40.1,-18.1 40.1,18.1, body extent -40,-18 40,18, height 16.6
"Inductor SMD1210" [mm]
  rrect50% 1.5x2 smd mask+0.075: 1(-1.5,0) 2(1.5,0)
  silkscreen extent -1.7,-1.35 1.7,1.35, body extent -1.79,-1.35 1.79,1.35, height 2.4
"Quartz DT-38T-32768Hz" [mm]
  rrect50% 3x1.5 hole 0.5 mask+0.075: 1(7,-1) 2(7,1)
  rrect50% 4x4 smd mask+0.075: 3(-3,0)
  silkscreen extent -0.75,-1.6 4.1,1.6, body extent -4,-1.5 7.15,1.5, height 3
"Quartz HC-49SM" [mm]
  rrect50% 5.5x2 smd mask+0.075: 1(-4.75,0) 2(4.75,0)
  silkscreen extent -5.8,-2.35 5.8,2.35, body extent -6.7,-2.4 6.7,2.4, height 4
"Resistor 3303X-3" [mm]
  rrect50% 1.2x1.2 smd mask+0.075: 1(-1,-1.6) 3(1,-1.6)
  rrect50% 1.6x1.5 smd mask+0.075: 2(0,1.65)
  silkscreen extent -1.65,-1.8 1.65,1.65, body extent -1.55,-1.95 1.55,1.85, height 1.62
"Resistor SMD0805" [mm]
  rrect50% 0.7x1.4 smd mask+0.075: 1(-0.95,0) 2(0.95,0)
  silkscreen extent -0.38,-0.7 0.38,0.7, body extent -1.05,-0.67 1.05,0.68, height 0.6
"Resistor SMD1206" [mm]
  rrect50% 0.9x1.8 smd mask+0.075: 1(-1.45,0) 2(1.45,0)
  silkscreen extent -0.8,-0.9 0.8,0.9, body extent -1.65,-0.85 1.65,0.85, height 0.65
"Resistor SMD2512" [mm]
  rrect50% 1.6x3.4 smd mask+0.075: 1(-2.9,0) 2(2.9,0)
  silkscreen extent -1.9,-1.7 1.9,1.7, body extent -3.2,-1.65 3.2,1.65, height 0.65
"SolderJump 1" [mm]
  round 0.5 smd mask+0.075: 1(-0.5,0) 2(0.5,0)
  Top Layer region: -0.075,-0.746 -0.418,-0.623 -0.662,-0.353 -0.75,0 -0.75,0 -0.662,0.353 -0.418,0.623 -0.075,0.746 -0.075,0.746
  Top Layer region: 0.075,0.746 0.418,0.623 0.662,0.353 0.75,0 0.75,0 0.662,-0.353 0.418,-0.623 0.075,-0.746 0.075,-0.746
  silkscreen extent -1,-1 1,1
"Transisror IRF7105" [mm]
  rrect50% 1.5x0.6 smd mask+0.075: D1(2.7,0.635) D1(2.7,1.905) D2(2.7,-1.905) D2(2.7,-0.635) G1(-2.7,0.635) G2(-2.7,-1.905) S2(-2.7,-0.635)
  rect 1.5x0.6 smd mask+0.075: S1(-2.7,1.905)
  silkscreen extent -4.12,-2.52 2.05,2.52, body extent -3.1,-2.5 3.1,2.5, height 1.75
"Transistor SOT23" [mm]
  rrect50% 0.8x0.9 smd mask+0.075: 1(-1,-1.1) 2(1,-1.1) 3(0,1.1)
  silkscreen extent -1.55,-0.75 1.55,0.75, body extent -1.5,-1.3 1.5,1.3, height 1.1

## Part data
C1 C14: library part "Filter NFM21PC105B1С3D"
C2 C22 C30 C31 C32 C33 C35: library part "Capacitor C0805_10u"
C3 C13 C16 C34: library part "Capacitor C0805_10n"
C4: library part "Capacitor C0805_5mm_100n"
C5 C8 C40: library part "Capacitor C0805_4.7n"
C6: library part "Capacitor C0805_22p"
C7: library part "Capacitor C0805_5mm_33n"
C9 C10: library part "Capacitor ECAP SMD 1000uF_6.3V"
C11 C15 C19 C20 C21 C23 C24 C26 C29 C36 C37 C43 C46 C48 C49 C53: library part "Capacitor C0805_100n"
C12: library part "Capacitor C0805_2.2u"
C17 C18: library part "Capacitor C0805_30p"
C25 C42: library part "Capacitor ECAP SMD 470uF_16V"
C27 C54: library part "Capacitor C0805_4.7u"
C28 C41 C44 C52: library part "Capacitor C0805_1u"
C38 C39: library part "Capacitor C0805_680n"
C45: library part "Capacitor C0805_1n"
C47: library part "Capacitor C0805_10p"
C50 C51: library part "Capacitor C0805_15p"
C55: library part "Capacitor C0805_47n"
DA1: library part "IC AD8606ARZ"
DA2: library part "IC LD1117S33"
DA3: library part "IC LD1117S50"
DA4: library part "IC LP2985-33DBVR"
DA5: library part "IC LD1117STR"
DA6: library part "IC MC34119L"
DD1: library part "IC STM32F100C8T6B"
DD2: library part "IC AT24C08C"
DD3: library part "IC KT0803L"
DD4: library part "IC CP2102-GMR"
FU1: library part "Fuse MF-NSMF050-2"
FU2: library part "Fuse MF-NSMF014-2"
HG1: library part "Indicator WH1602"
L1: library part "Inductance L1210_1uH"
R1 R2: library part "Resistor R0805_10k_1%"
R3: library part "Resistor R0805_2k_1%"
R4: library part "Resistor R0805_100_1%"
R5 R9: library part "Resistor R0805_2k_5%"
R6 R8: library part "Resistor R0805_100k_1%"
R7: library part "Resistor R0805_1.2k_1%"
R10 R33 R34 R60: library part "Resistor R0805_100k_5%"
R11 R16 R20 R29 R30 R32 R36 R42 R43 R47 R54: library part "Resistor R0805_10k_5%"
R12 R14 R15 R21 R25 R28 R31 R41 R46 R50 R56 R57 R58 R59: library part "Resistor R0805_1k_5%"
R13: library part "Resistor R2512_7.5R_5%"
R17 R18: library part "Resistor R1206_1R_5%"
R19: library part "Resistor 3303X-3-103_10k_25%"
R22 R23 R24: library part "Resistor R0805_100_5%"
R26 R27 R53: library part "Resistor R0805_4.7k_5%"
R35: library part "Resistor R0805_330k_5%"
R37 R44: library part "Resistor R0805_220k_5%"
R38: library part "Resistor R0805_18k_5%"
R39: library part "Resistor R0805_3.3k_5%"
R40: library part "Resistor R0805_150_5%"
R45: library part "Resistor R0805_470k_5%"
R48: library part "Resistor R0805_33k_5%"
R49: library part "Resistor R0805_270R_5%"
R51 R52: library part "Resistor R0805_2R_5%"
R55: library part "Resistor R0805_47k_5%"
SB1 SB2 SB3 SB4 SB5 SB6 SB7: library part "Button KLS7-TS6604-4.3-180", "SMD Tact Switch 4.3mm"
VD1 VD2 VD3 VD5 VD8: library part "Diode 1N4148WS", "150mA 100V 4ns"
VD4 VD6: library part "Diode ES1J", "1A 600V 35ns"
VD7 VD10: library part "Diode LED0805RED", "LED Red SMD0805"
VD9: library part "Diode BAT54WS", "200mA 30V Schottky"
VD11: library part "Diode LED0805GREEN", "LED Green SMD0805"
VT1 VT3 VT4 VT8: library part "Transistor BC847B"
VT2: library part "Transistor IRF7105PBF"
VT5 VT6: library part "Transistor IRLML6402TRPBF"
VT7 VT11: library part "Transistor IRLML2502TRPBF"
VT9: library part "Transistor 2N7002"
VT10: library part "Transistor 2SC3356"
X1: library part "Connector SWD", "PLS-4 Connector"
X2: library part "Connector BOOT", "PLS-2 Connector"
X3: library part "Connector UART", "PLS-3 Connector"
X4: library part "Connector SPEAKER", "B2B-XH-A  Connector"
X5: library part "Connector PJ-311D", "Audio Jack 3.5mm"
X6: library part "Connector KLS1-233-0-0-1-T", "microUSB Connector"
ZQ1: library part "Quartz HC-49SM-8MHz"
ZQ2: library part "Quartz DT-38T-32768Hz"

## Nets (pads, with @x,y where several pads share a name; then routed paths per layer and width w, separated by ;. In a path a pad name is that pad's centre, name@x,y a point inside that pad or via, vN(x,y) a via of type N, cw(c..) or ccw(c..) an arc to the next point about the centre after c; other vN are vias at no path point)
BOOT0: DD1.44 R28.1 R30.1 R57.1
BRIGHT: DD1.12 R21.1 R25.2
BTN0: DD1.46 SB1.3
BTN1: DD1.45 SB2.3
BTN2: DD1.43 SB3.3
BTN3: DD1.42 SB4.3
BTN4: DD1.41 SB5.3
BTN5: DD1.40 SB6.3
EE_SCL: DD1.3 DD2.6 DD3.14 R26.1
EE_SDA: DD1.2 DD2.5 DD3.13 R27.1
GND: *1.2 *1.3 *1.4 *2.2 C1.2 C2.1 C3.1 C5.1 C7.2 C8.1 C9.2 C10.2 C11.2 C12.1 C13.1 C14.2 C15.1 C16.1 C17.1 C18.1 C19.1 C20.1 C21.1 C22.1 C23.2 C24.1 C25.2 C29.1 C30.1 C31.1 C32.1 C33.1 C34.1 C35.1 C36.1 C37.1 C38.1 C39.1 C42.2 C43.1 C44.1 C49.1 C50.2 C51.2 C52.1 C53.1 C54.1 DA1.4 DA2.1 DA3.1 DA4.2 DA6.7 DD1.8 DD1.23 DD1.35 DD1.47 DD2.1 DD2.2 DD2.3 DD2.4 DD2.7 DD3.1 DD3.5 DD3.9 DD3.11 DD3.12 DD3.15 DD4.3 DD4.EP HG1.1 HG1.5 HG1.7 HG1.8 HG1.9 HG1.10 R2.1 R17.1 R18.1 R19.3 R20.2 R30.2 R36.1 R37.2 R39.1 R54.2 R60.1 SB1.2 SB2.2 SB3.2 SB4.2 SB5.2 SB6.2 SB7.2 SJ1.1 SJ2.2 VD6.1 VD7.2 VD10.2 VD11.2 VT3.2 VT4.2 VT7.2 VT8.2 VT9.2 VT10.2 VT11.2 X1.4 X3.2 X6.5 X6.EP ZQ2.3
HLED: DD1.33 R31.1
I_TX: C12.2 DD1.19 R16.2
LCD_D4: DD1.28 HG1.11
LCD_D5: DD1.27 HG1.12
LCD_D6: DD1.26 HG1.13
LCD_D7: DD1.25 HG1.14
LCD_E: DD1.38 HG1.6
LCD_RS: DD1.39 HG1.4
Net*1_1: *1.1 C4.1
Net*1_5: *1.5 R13.1
Net*2_1: *2.1 FU1.1
NetC1_1: C1.1 C3.2 DA1.8 R1.2 VD1.2
NetC2_2: C2.2 DA1.5 R1.1 R2.2
NetC4_2: C4.2 R4.1
NetC6_1: C6.1 DA1.2 R6.1 R7.1 R8.2
NetC6_2: C6.2 DA1.1 R5.1 R6.2
NetC7_1: C7.1 R7.2
NetC8_2: C8.2 R8.1 R9.2
NetC13_2: C13.2 HG1.3 R19.2 R21.2
NetC14_1: C14.1 C16.2 DD1.9
NetC17_2: C17.2 DD1.5 ZQ1.1
NetC18_2: C18.2 DD1.6 ZQ1.2
NetC26_1: C26.1 C28.2 R33.1 VT6.1 VT7.3
NetC26_2: C26.2 R32.2 R33.2 VD8.2 VT5.2 VT6.2
NetC27_1: C27.1 R35.1 R37.1 VT7.1
NetC28_1: C28.1 R32.1 SB7.3 VD9.2
NetC34_2: C34.2 DA4.4
NetC38_2: C38.2 R42.2 R43.1
NetC39_2: C39.2 R43.2 R44.1
NetC40_1: C40.1 DA6.4 R47.2 R48.1
NetC40_2: C40.2 DA6.5 R48.2 R51.1
NetC41_2: C41.2 R47.1
NetC44_2: C44.2 DA6.3
NetC45_1: C45.1 L1.2 VT10.3
NetC45_2: C45.2 WA1.1
NetC46_2: C46.2 DD3.6
NetC47_1: C47.1 DD3.16
NetC47_2: C47.2 R55.1 VT10.1
NetC48_2: C48.2 DD3.7
NetC50_1: C50.1 DD3.3 ZQ2.2
NetC51_1: C51.1 DD3.2 ZQ2.1
NetC52_2: C52.2 DD4.7 DD4.8 FU2.2
NetC55_1: C55.1 R60.2 VT11.1
NetDA1_3: DA1.3 R3.1 R4.2 VD1.1
NetDA1_6: DA1.6 DA1.7 R3.2
NetDA5_1: DA5.1 R40.2 R45.2 SJ1.2 VT9.3
NetDA6_1: DA6.1 R50.2 SJ2.1
NetDA6_8: DA6.8 R52.1
NetDD1_20: DD1.20 R20.1
NetDD1_30: DD1.30 R22.2
NetDD1_31: DD1.31 R23.2
NetDD3_8: DD3.8 R56.2
NetDD4_4: DD4.4 X6.3
NetDD4_5: DD4.5 X6.2
NetDD4_9: DD4.9 R58.1
NetFU1_2: FU1.2 VT5.3
NetFU2_1: FU2.1 X6.1
NetHG1_15: HG1.15 R24.1
NetHG1_16: HG1.16 VT4.3
NetR10_1: R10.1 R12.2 R14.2 VD2.1 VD3.1 VD5.1 VT1.2
NetR11_1: R11.1 VD3.2 VT1.1 VT3.3
NetR12_1: R12.1 VD2.2 VT2.G2
NetR13_2: R13.2 VD4.1 VD6.2 VT2.D1 VT2.D2
NetR14_1: R14.1 VD5.2 VT2.G1
NetR15_1: R15.1 VT3.1
NetR16_1: R16.1 R17.2 R18.2 VT2.S1
NetR25_1: R25.1 VT4.1
NetR28_2: R28.2 X2.2
NetR31_2: R31.2 VD7.1
NetR34_1: R34.1 R35.2 VD9.1
NetR36_2: R36.2 VD8.1 VT5.1
NetR41_2: R41.2 R42.1 VT8.3
NetR44_2: R44.2 R45.1 VT9.1
NetR46_2: R46.2 VT8.1
NetR49_1: R49.1 X5.1 X5.2
NetR49_2: R49.2 R51.2 X4.2
NetR52_2: R52.2 X5.3 X5.4
NetR53_2: R53.2 R55.2 VD10.1
NetR59_2: R59.2 VD11.1
NetX4_1: X4.1 X5.5 X5.6
NRST: C23.1 DD1.7 R29.1 VT11.3
PWM: DD1.13 R46.1
RS_RX: DD4.26 R23.1 X3.1
RS_TX: DD4.25 R22.1 R59.1 X3.3
SIN_C: DD1.15 R9.1
SOUND: C41.1 C46.1 C48.1 DD1.14 R54.1
SW: DD1.4 R50.1 R56.1
SWCLK: DD1.37 X1.2
SWDIO: DD1.34 X1.3
TX: DD1.21 R15.2
U_RX: C5.2 DD1.17 R5.2
UP_CTR: C36.2 DD1.11 R38.1 R39.2
USB_3V3: C53.2 C54.2 C55.2 DD4.6 R57.2 R58.2
V_BAT: C25.1 C27.2 C29.2 C31.2 C33.2 C37.2 C42.1 C43.2 DA2.3 DA3.3 DA4.1 DA4.3 DA5.3 DA6.6 R34.2 R38.2 VT6.3
VDD: C19.2 C20.2 C21.2 C22.2 C24.2 C30.2 C49.2 DA2.2 DA2.4 DD1.1 DD1.24 DD1.36 DD1.48 DD2.8 DD3.4 DD3.10 L1.1 R26.2 R27.2 R29.2 R41.1 R53.1 X1.1 X2.1
VDD_COIL: C9.1 C10.1 C11.1 DA5.2 DA5.4 R10.2 R11.2 R40.1 VD4.2 VT1.3 VT2.S2
VDD_D: C15.2 C32.2 DA3.2 DA3.4 HG1.2 R19.1 R24.2
VDDA: C1.3 C14.3 C35.2 DA4.5
pads on no net: DA6.2 DD1.10 DD1.16 DD1.18 DD1.22 DD1.29 DD1.32 DD4.1 DD4.2 DD4.10 DD4.11 DD4.12 DD4.13 DD4.14 DD4.15 DD4.16 DD4.17 DD4.18 DD4.19 DD4.20 DD4.21 DD4.22 DD4.23 DD4.24 DD4.27 DD4.28 HG1.MH SB1.1 SB1.4 SB2.1 SB2.4 SB3.1 SB3.4 SB4.1 SB4.4 SB5.1 SB5.4 SB6.1 SB6.4 SB7.1 SB7.4 X5.MH X6.4 X6.MH

## Silkscreen, mask and mechanical layers (free items; w line width, h text height)
Mechanical 15:
  the board outline again, w0.2